# Altium PCB PCB.pcbdoc
Units mm, origin at the board's own origin, x right, y up, seen from the top; angles counter-clockwise.
Board outline 190.51 x 152.36 mm, 2 copper layers (Top Layer, Bottom Layer); 20 components, 79 nets, 137 pads, 6 vias.
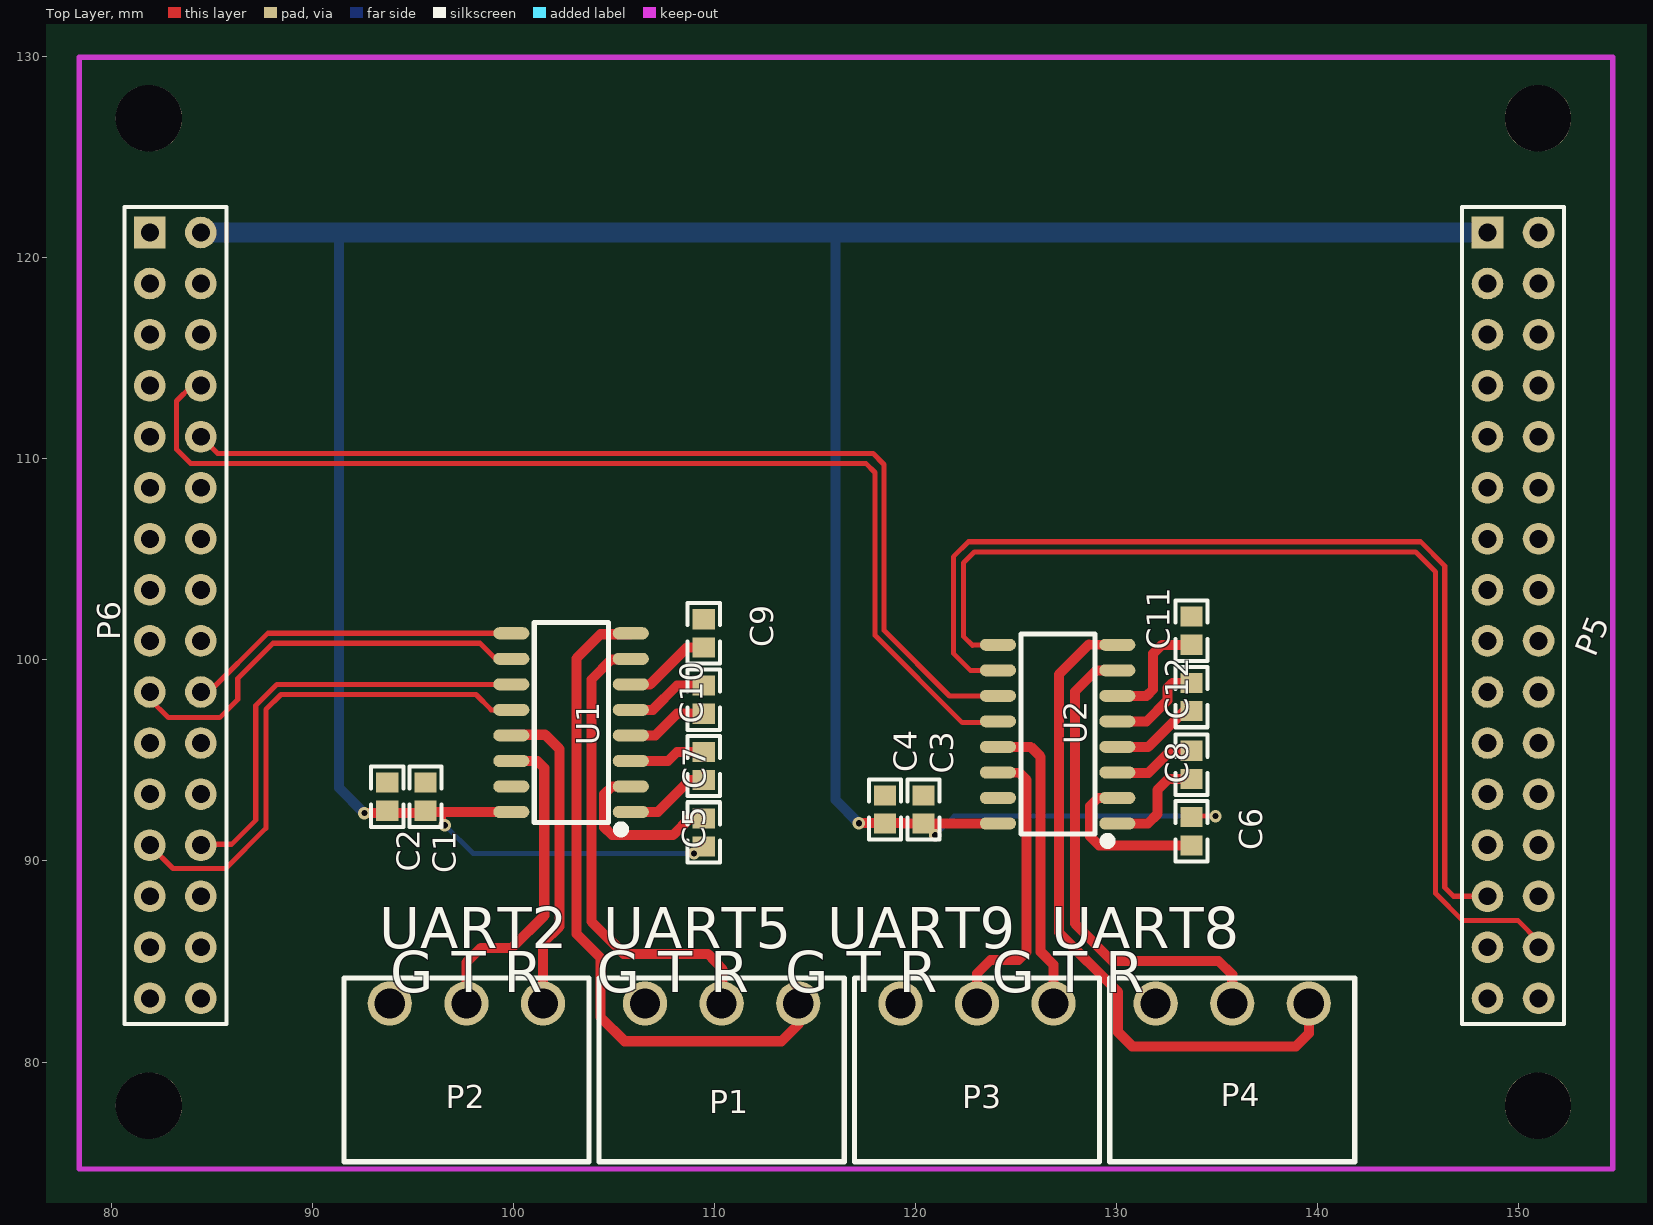
[diagram p0: Top Layer view]
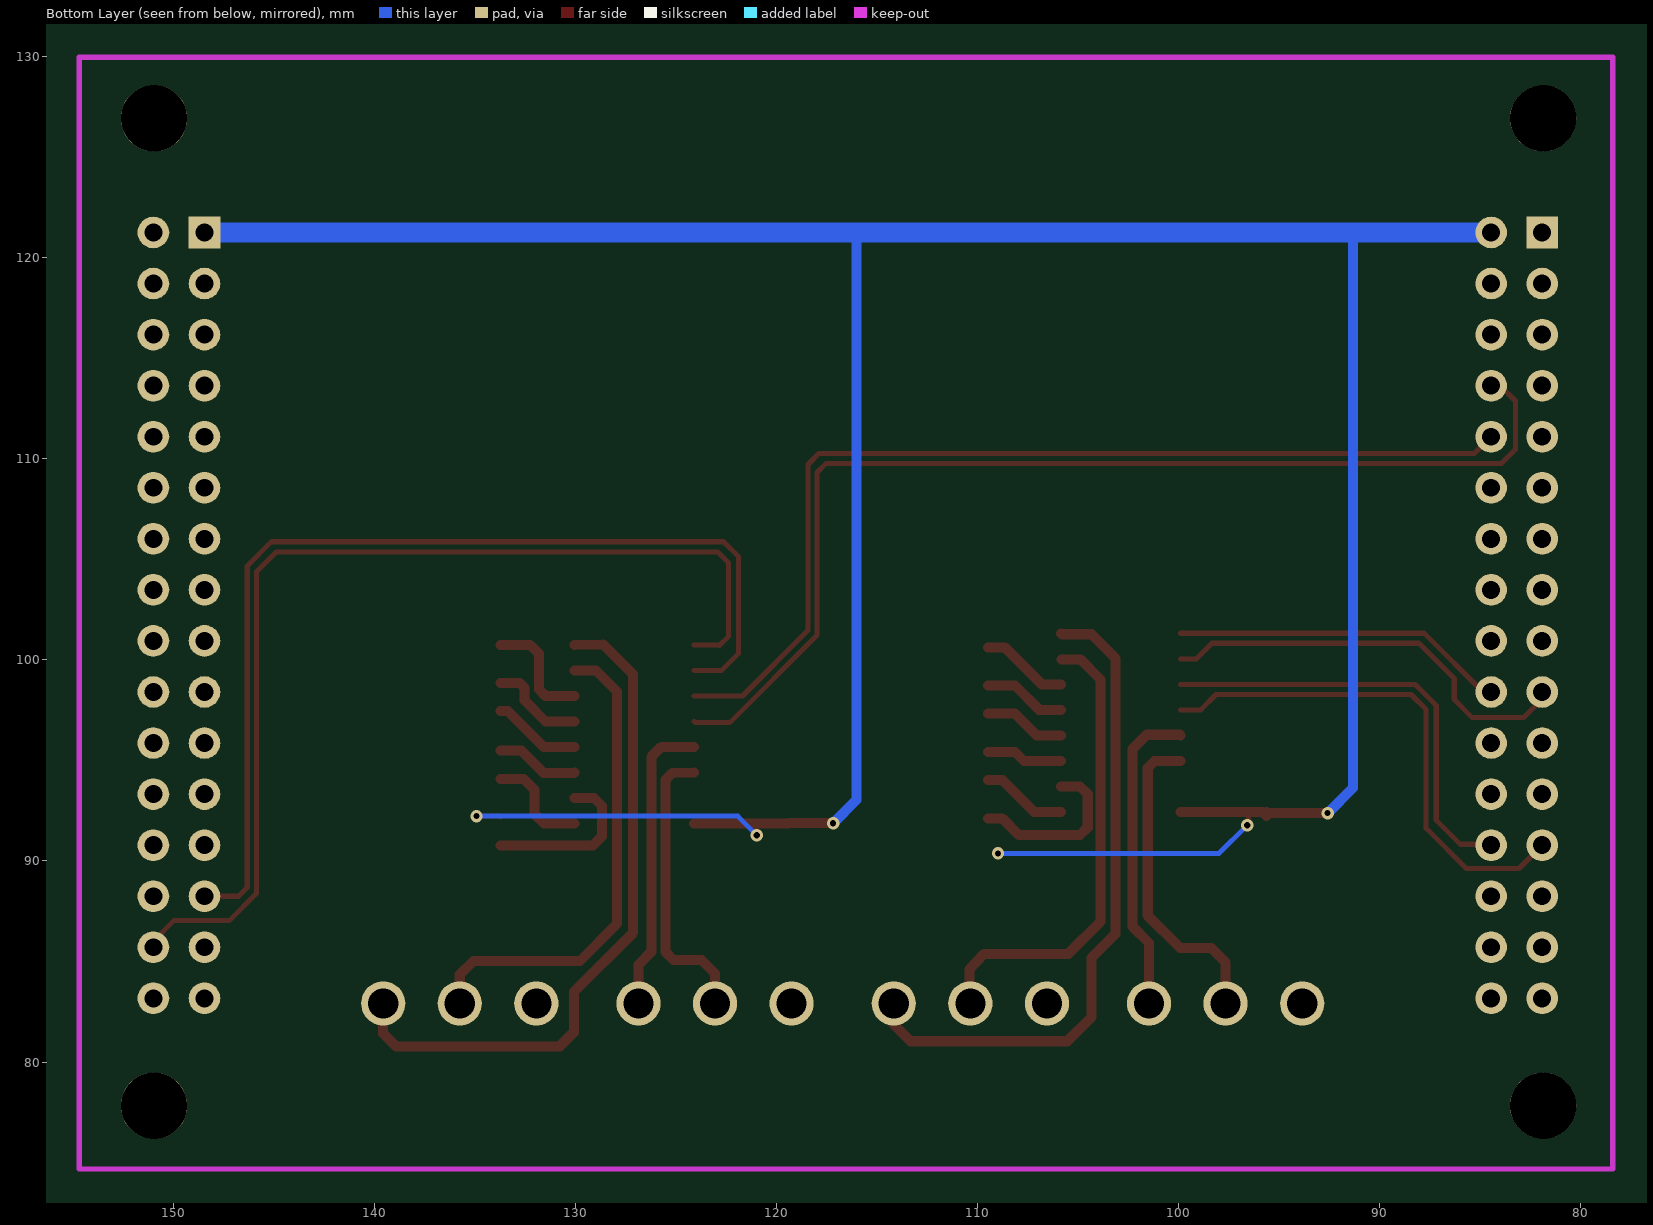
[diagram p1: Bottom Layer view, seen from below]

## Layer stack, top to bottom
Top Layer: signal copper (thickness not stored)
Dielectric: dielectric 0.32, FR-4, Dk 4.8
Bottom Layer: signal copper (thickness not stored)

## Board outline
215.91,25.4 25.4,25.4 25.4,177.76 215.91,177.76

## Components (designator, comment, footprint, x,y, rotation, side; value= is the part's Value field where it differs from the comment)
C1 "100nF" 0603 95.604,93.201 r90 top
C2 "4.7uF" 0603 93.699,93.201 r90 top
C3 "100nF" 0603 120.369,92.563 r90 top
C4 "4.7uF" 0603 118.464,92.566 r90 top
C5 "1uF" 0603 109.447,91.423 r270 top
C6 "1uF" 0603 133.709,91.481 r90 top
C7 "1uF" 0603 109.447,94.725 r90 top
C8 "1uF" 0603 133.704,94.787 r90 top
C9 "1uF" 0603 109.447,101.329 r270 top
C10 "1uF" 0603 109.447,98.027 r90 top
C11 "1uF" 0603 133.704,101.456 r270 top
C12 "1uF" 0603 133.704,98.154 r90 top
P1 "WJ15EDGRC-3.81-3P" WJ15EDGRC-3.81-3P 110.336,82.914 r0 top
P2 "WJ15EDGRC-3.81-3P" WJ15EDGRC-3.81-3P 97.636,82.914 r0 top
P3 "WJ15EDGRC-3.81-3P" WJ15EDGRC-3.81-3P 123.036,82.914 r0 top
P4 "WJ15EDGRC-3.81-3P" WJ15EDGRC-3.81-3P 135.736,82.914 r0 top
P5 "Header-Female-2.54_2x16" HDR-16X2/2.54 150.976,100.948 r270 top
P6 "Header-Female-2.54_2x16" HDR-16X2/2.54 84.428,100.948 r270 top
U1 "MAX232ESE" SOIC-16_150MIL 102.843,96.884 r90 top
U2 "MAX232ESE" SOIC-16_150MIL 127.05,96.311 r90 top

## Footprints (in the part's own frame and the unit in brackets; to place one, negate y for a bottom-side part, rotate by r counter-clockwise, add the part's x,y. Pads: shape width x height; smd on the part's side, far side on the other; paste and mask are expansions set on the pad)
0603 [mm]
  rect 1x1.1 smd: 1(-0.7,0) 2(0.7,0)
  silkscreen extent -1.5,-0.8 1.5,0.8
HDR-16X2/2.54 [mil]
  rect 62x62 hole 35: 1(-800,-100)
  round 62 hole 35: 2(-800,0) 3(-700,-100) 4(-700,0) 5(-600,-100) 6(-600,0) 7(-500,-100) 8(-500,0) 9(-400,-100) 10(-400,0) 11(-300,-100) 12(-300,0) 13(-200,-100) 14(-200,0) 15(-100,-100) 16(-100,0) 17(0,-100) 18(0,0) 19(100,-100) 20(100,0) 21(200,-100) 22(200,0) 23(300,-100) 24(300,0) 25(400,-100) 26(400,0) 27(500,-100) 28(500,0) 29(600,-100) 30(600,0) 31(700,-100) 32(700,0)
  silkscreen extent -850,-150 750,50
SOIC-16_150MIL [mm]
  oval 0.6x1.798 smd: 1(-4.445,-2.972) 2(-3.175,-2.972) 3(-1.905,-2.972) 4(-0.635,-2.972) 5(0.635,-2.972) 6(1.905,-2.972) 7(3.175,-2.972) 8(4.445,-2.972) 9(4.445,2.972) 10(3.175,2.972) 11(1.905,2.972) 12(0.635,2.972) 13(-0.635,2.972) 14(-1.905,2.972) 15(-3.175,2.972) 16(-4.445,2.972)
  silkscreen extent -5.51,-2.69 4.98,1.83
WJ15EDGRC-3.81-3P [mm]
  round 2.2 hole 1.5: 1(-3.81,0) 2(0,0) 3(3.81,0)
  silkscreen extent -6.1,-7.88 6.1,1.27

## Free pads (board coordinates)
  round 3.302 hole 3.302 unplated: ""(81.839,77.828) ""(81.839,126.947) ""(150.949,77.828) ""(150.949,126.947) ""(150.949,126.947)

## Via types
v1: diameter 0.61, hole 0.305, Top Layer to Bottom Layer, 6 vias

## Nets (pads, with @x,y where several pads share a name; then routed paths per layer and width w, separated by ;. In a path a pad name is that pad's centre, name@x,y a point inside that pad or via, vN(x,y) a via of type N, cw(c..) or ccw(c..) an arc to the next point about the centre after c; other vN are vias at no path point)
3.3V: P5.3 P6.4
+5V: C1.1 C2.1 C3.1 C4.1 C5.2 C6.2 P5.1 P5.29 P5.31 P6.2 U1.16 U2.16 | length 168.6
  Top Layer w0.254: 96.506,92.439 96.506,91.834 v1(96.56,91.781) ; v1(120.96,91.281) 121.002,91.323 121.002,91.866 ; C6.2@133.709,92.181 133.759,92.231 v1(134.909,92.231)
  Top Layer w0.5: v1(92.56,92.381) 95.547,92.381 C1.1@95.604,92.439 ; C1.1@95.604,92.246 95.798,92.439 U1.16 ; v1(117.159,91.881) 119.388,91.881 119.406,91.863 C3.1 120.373,91.866 U2.16
  Bottom Layer w0.254: v1(96.56,91.781) 97.959,90.381 v1(108.959,90.381) ; v1(120.96,91.281) 121.909,92.231 v1(134.909,92.231)
  Bottom Layer w0.5: v1(92.56,92.381) 91.309,93.63 91.309,120.93 91.647,121.268 92.61,121.268 ; 116.057,121.268 116.008,121.222 116.008,93.031 v1@117.159,91.88
  Bottom Layer w1: P6.2 P5.1
C5_1: C5.1 U1.2 | length 8.6
  Top Layer w0.5: U1.2 104.875,93.709 104.494,93.328 104.494,91.677 104.875,91.296 107.923,91.296 108.752,92.124 C5.1
C7_1: C7.1 U1.1 | length 4.3
  Top Layer w0.5: U1.1 107.161,92.439 108.747,94.025 C7.1
C7_2: C7.2 U1.3 | length 3.8
  Top Layer w0.5: U1.3 107.669,94.979 108.117,95.426 C7.2
C9_2: C9.2 U1.6 | length 4.4
  Top Layer w0.5: U1.6 106.78,98.789 108.62,100.629 C9.2
C10_1: C10.1 U1.4 | length 4.1
  Top Layer w0.5: U1.4 107.034,96.249 108.112,97.327 C10.1
C10_2: C10.2 U1.5 | length 4.1
  Top Layer w0.5: U1.5 106.907,97.519 108.116,98.727 C10.2
GND: C1.2 C2.2 C3.2 C4.2 C9.1 C11.1 P1.1 P2.1 P3.1 P4.1 P5.2 P5.4 P5.32 P6.1 P6.31 U1.15 U2.15
PA0: P6.9
PA1: P6.12
PA2: P6.11
PA3: P6.14
PA4: P6.13
PA5: P6.16
PA6: P6.15
PA7: P6.18
PA8: P6.17
PA9: P6.20 U1.9 | length 16.7
  Top Layer w0.254: P6.20 84.837,98.408 87.758,101.329 U1.9
PA10: P6.19 U1.10 | length 21.2
  Top Layer w0.254: P6.19 81.888,98.052 82.811,97.13 85.361,97.13 86.26,98.032 86.26,99.081 88.01,100.831 98.31,100.831 99.082,100.059 U1.10
PA11: P6.22
PA12: P6.21
PB0: P6.32
PB1: P5.26
PB2: P5.24
PB3: P5.23
PB5: P5.25
PB7: P5.28
PB8: P5.27 U2.10 | length 50.9
  Top Layer w0.254: U2.10@124.078,99.485 122.706,99.485 121.86,100.331 121.86,105.131 122.61,105.88 145.109,105.88 146.311,104.682 146.311,88.682 146.742,88.248 P5.27
PB13: P5.10
PC0: P5.30 U2.9 | length 52.1
  Top Layer w0.254: U2.9@124.078,100.755 122.81,100.732 122.358,101.181 122.358,104.831 122.909,105.38 144.86,105.38 145.858,104.382 145.858,88.38 147.21,87.031 149.96,87.031 150.976,86.013 P5.30
PD8: P5.21
PD9: P5.22
PD10: P5.19
PD11: P5.20
PD12: P5.17
PD13: P5.18
PD14: P5.15
PD15: P5.16
PF7: P5.8
PF8: P5.7
PF9: P5.6
PF10: P5.5
PG0: P6.29
PG1: P6.30
PG3: P6.27
PG5: P6.28
PG6: P6.25 U1.12 | length 25.8
  Top Layer w0.254: P6.25 83.044,89.632 85.66,89.632 87.659,91.631 87.659,97.532 88.409,98.281 98.109,98.281 98.871,97.519 U1.12
PG7: P6.26 U1.11 | length 22.1
  Top Layer w0.254: P6.26 84.472,90.831 85.96,90.831 87.159,92.03 87.159,97.73 88.218,98.789 U1.11
PG8: P6.23
PG9: P6.24
PG11: P5.13
PG12: P5.14
PG13: P5.11
PG14: P5.12
PG15: P5.9
S$67: 
S$69: 
S$2331: 
U2_1: C8.1 U2.1 | length 5.3
  Top Layer w0.5: U2.1@130.021,91.865 131.545,91.865 132.01,92.33 132.01,93.531 132.567,94.087 C8.1
U2_2: C6.1 U2.2 | length 8.3
  Top Layer w0.5: U2.2@130.021,93.135 129.059,93.13 128.66,92.731 128.66,91.23 129.11,90.78 C6.1@133.71,90.78
U2_3: C8.2 U2.3 | length 4.2
  Top Layer w0.5: U2.3 130.046,94.381 131.559,94.381 132.665,95.487 C8.2
U2_4: C12.1 U2.4 | length 4.4
  Top Layer w0.5: U2.4@130.021,95.675 131.553,95.675 133.334,97.453 C12.1@133.704,97.453
U2_5: C12.2 U2.5 | length 4.8
  Top Layer w0.5: U2.5@130.021,96.945 131.474,96.945 132.508,97.981 132.508,98.611 132.755,98.855 C12.2
U2_6: C11.2 U2.6 | length 5.8
  Top Layer w0.5: U2.6 131.48,98.216 131.799,98.535 131.799,100.313 132.242,100.756 C11.2
UART2_232RXD: P1.3 U1.8 | length 33.3
  Top Layer w0.5: U1.8 105.767,101.281 104.309,101.281 103.11,100.082 103.11,86.381 104.309,85.182 104.309,82.231 105.51,81.032 113.308,81.032 114.146,81.867 P1.3
UART2_232TXD: P1.2 U1.7 | length 23.7
  Top Layer w0.5: U1.7@105.803,100.031 104.858,100.031 103.859,99.033 103.859,86.983 105.46,85.38 108.487,85.38 109.658,85.38 110.387,84.605 P1.2@110.387,82.815
UART5_232RXD: P2.3 U1.13 | length 15.7
  Top Layer w0.5: U1.13 99.905,96.282 101.558,96.282 102.259,95.581 102.259,86.731 101.446,85.919 P2.3
UART5_232TXD: P2.2 U1.14 | length 16
  Top Layer w0.5: P2.2 97.636,84.959 98.36,85.68 99.91,85.68 101.51,87.28 101.51,94.631 101.162,94.979 U1.14
UART8_232RXD: P4.3 U2.8 | length 34.1
  Top Layer w0.5: U2.8@130.021,100.755 128.609,100.78 127.111,99.282 127.111,86.432 130.06,83.48 130.06,81.481 130.761,80.78 138.909,80.78 139.546,81.418 P4.3
UART8_232TXD: P4.2 U2.7 | length 24.4
  Top Layer w0.5: U2.7@130.021,99.485 128.96,99.48 127.908,98.431 127.908,86.881 129.76,85.03 135.058,85.03 135.736,84.354 P4.2
UART9_232RXD: P3.3 U2.13 | length 14.9
  Top Layer w0.5: U2.13@124.078,95.675 125.709,95.68 126.209,95.182 126.209,85.482 126.846,84.844 P3.3
UART9_232TXD: P3.2 U2.14 | length 14.5
  Top Layer w0.5: P3.2 123.036,84.407 123.71,85.08 125.109,85.08 125.51,85.482 125.51,94.031 125.16,94.382 U2.14@124.078,94.405
UART9_RXD: P6.8 U2.12 | length 55.2
  Top Layer w0.254: P6.8 83.979,113.648 83.209,112.878 83.209,110.48 83.91,109.782 117.509,109.782 117.959,109.332 117.959,101.232 122.31,96.881 124.012,96.881 U2.12@124.078,96.945
UART9_TXD: P6.10 U2.11 | length 49.8
  Top Layer w0.254: P6.10 85.257,110.28 117.86,110.28 118.409,109.731 118.409,105.332 118.409,101.481 121.675,98.215 U2.11@124.078,98.215
USB0_DM: P6.6
USB0_DP: P6.3
USB1_DM: P6.7
USB1_DP: P6.5

## Polygon pours and split planes (outlines as drawn)
GND on Bottom Layer (solid): 54.11,38.14 53.85,153.96 203.21,154.22 202.69,38.14 54.15,38.1
GND on Top Layer (solid): 38.36,48.981 38.1,164.8 187.46,165.06 186.94,48.981 38.4,48.941

## Silkscreen, mask and mechanical layers (free items; w line width, h text height)
Top Overlay:
  text "UART2  UART5  UART9  UART8" at 93.309,85.668 h2.03
  text "G T R   G T R  G T R   G T R" at 93.86,83.465 h2.03
Document:
  lines w0.003: 120.63,101.555 120.68,101.606